# EAGLE board UVled (EAGLE 6.3)

Size 100 x 80 mm. Coordinates in mm from the lower left corner, seen from the top.
Outline: 0,0 100,0 100,80 0,80 0,0
Copper layers (1*16): Top 0.035mm / dielectric 1.5mm / Bottom 0.035mm
Design rules "default": minimum track width 10mil, minimum drill 24mil, track to track 8mil, track to pad 8mil, pad to pad 8mil, via to via 8mil, smd to smd 8mil, copper to edge 40mil, drill to drill 8mil, minimum pad ring 10mil, minimum via ring 8mil, stop-mask expansion 4mil, vias tented up to drill 0mil, thermal gap 10mil

## Footprints (pad centres in the part's own frame; a part is rotated, then mirrored left to right if it is on the bottom)
LED5MM = drill 0.813 pad 1.676 octagon: A -1.27,0; K 1.27,0
AXIAL-0.3 = drill 0.9 pad 1.88: P$1 -3.81,0; P$2 3.81,0

## Placement (x,y rotation side)
LED1  [LED5MM]  8.19,7.56 0 top
LED2  [LED5MM]  8.41,16.43 0 top
LED3  [LED5MM]  8.21,25.18 0 top
LED4  [LED5MM]  8.41,34.05 0 top
LED5  [LED5MM]  8.21,42.8 0 top
LED6  [LED5MM]  19.66,42.92 0 top
LED7  [LED5MM]  19.46,34.17 0 top
LED8  [LED5MM]  19.66,25.54 0 top
LED9  [LED5MM]  19.46,16.79 0 top
LED10  [LED5MM]  19.64,7.56 0 top
LED11  [LED5MM]  31.25,7.5 0 top
LED12  [LED5MM]  31.25,16.25 0 top
LED13  [LED5MM]  31.25,25 0 top
LED14  [LED5MM]  31.25,33.75 0 top
LED15  [LED5MM]  31.25,42.5 0 top
LED16  [LED5MM]  42.5,42.5 0 top
LED17  [LED5MM]  42.5,33.75 0 top
LED18  [LED5MM]  42.5,25 0 top
LED19  [LED5MM]  42.5,16.25 0 top
LED20  [LED5MM]  42.5,7.5 0 top
R1  [AXIAL-0.3]  50,56.25 90 top
R2  [AXIAL-0.3]  53.75,56.25 90 top
R3  [AXIAL-0.3]  57.5,56.25 90 top
R4  [AXIAL-0.3]  61.25,56.25 90 top
R5  [AXIAL-0.3]  65,56.25 90 top
R6  [AXIAL-0.3]  68.75,56.25 90 top
R7  [AXIAL-0.3]  72.5,56.25 90 top
R8  [AXIAL-0.3]  76.25,56.25 90 top
R9  [AXIAL-0.3]  80,56.25 90 top
R10  [AXIAL-0.3]  83.75,56.25 90 top
R11  [AXIAL-0.3]  87.5,56.25 90 top
R12  [AXIAL-0.3]  91.25,56.25 90 top
R13  [AXIAL-0.3]  95,56.25 90 top
R14  [AXIAL-0.3]  63.75,28.75 90 top
R15  [AXIAL-0.3]  67.5,28.75 90 top
R16  [AXIAL-0.3]  71.25,28.75 90 top
R17  [AXIAL-0.3]  75,28.75 90 top
R18  [AXIAL-0.3]  78.75,28.75 90 top
R19  [AXIAL-0.3]  82.5,28.75 90 top
R20  [AXIAL-0.3]  86.25,28.75 90 top

## Library data of the parts
LED1-LED20 = adafruit
R1-R20 = SparkFun-Resistors